# Altium PCB PCB1.PcbDoc
Units mil, origin at the board's own origin, x right, y up, seen from the top; angles counter-clockwise.
Board outline 4500 x 2600 mil, 2 copper layers (Top Layer, Bottom Layer), stack 60.4 mil thick; 12 components, 26 nets, 99 pads, 0 vias.
Unrouted connection lines stored in the file: 42.
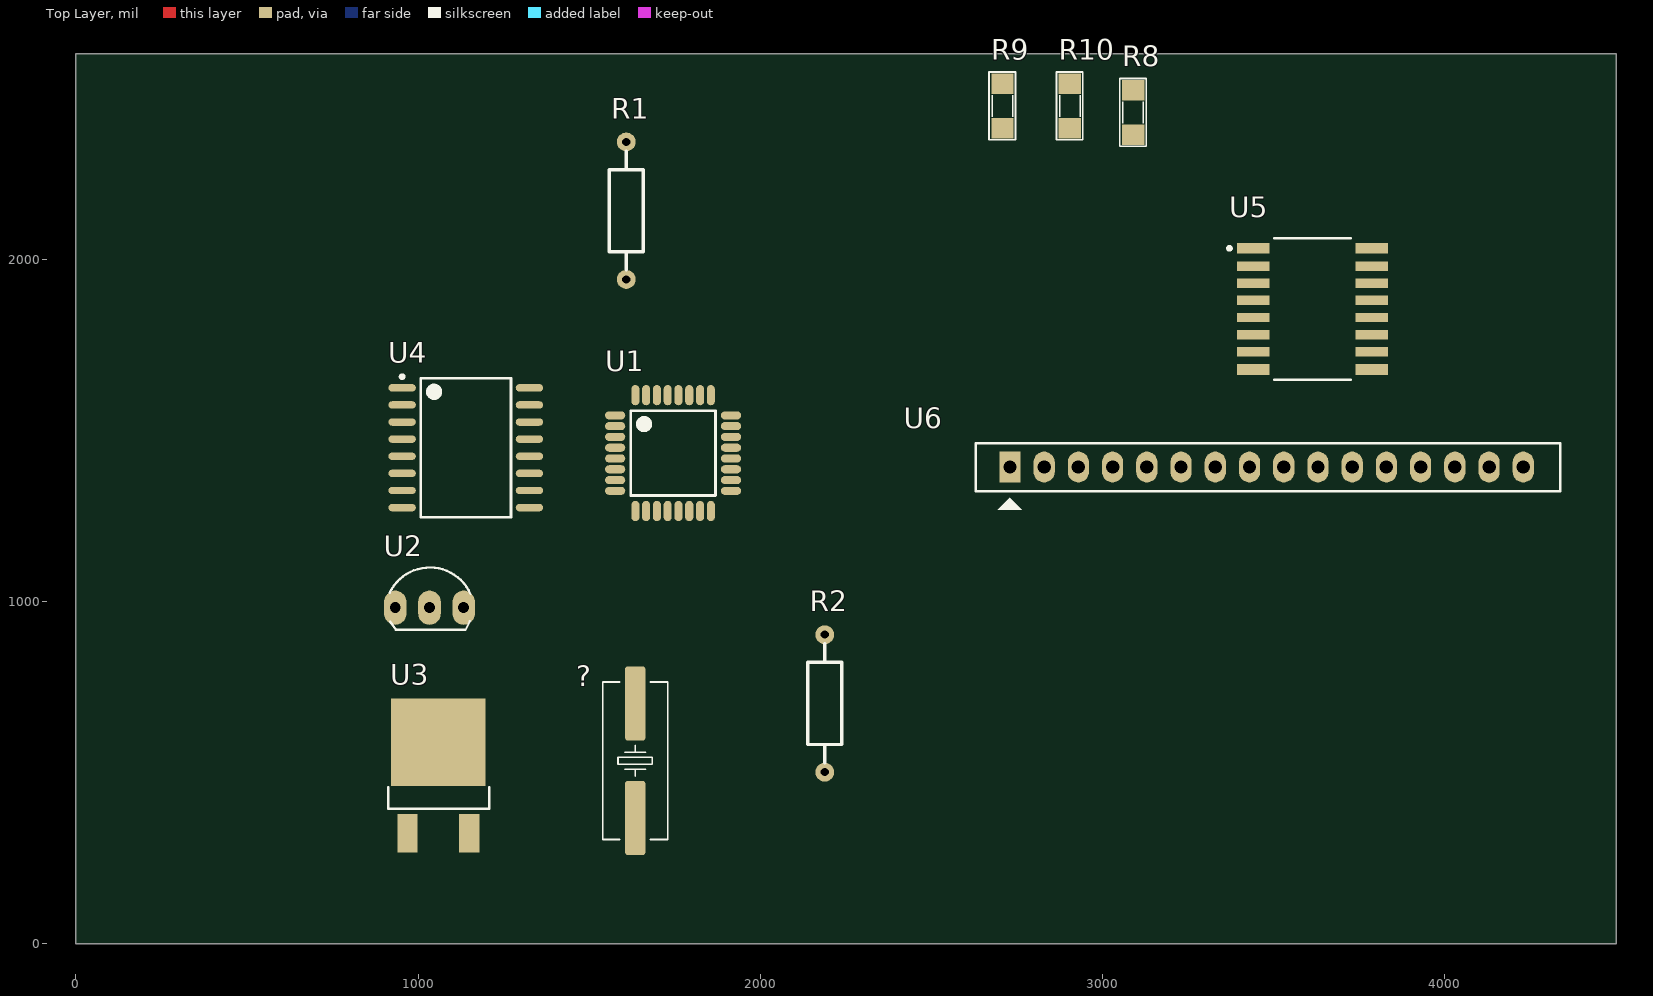
[diagram p0: Top Layer view]
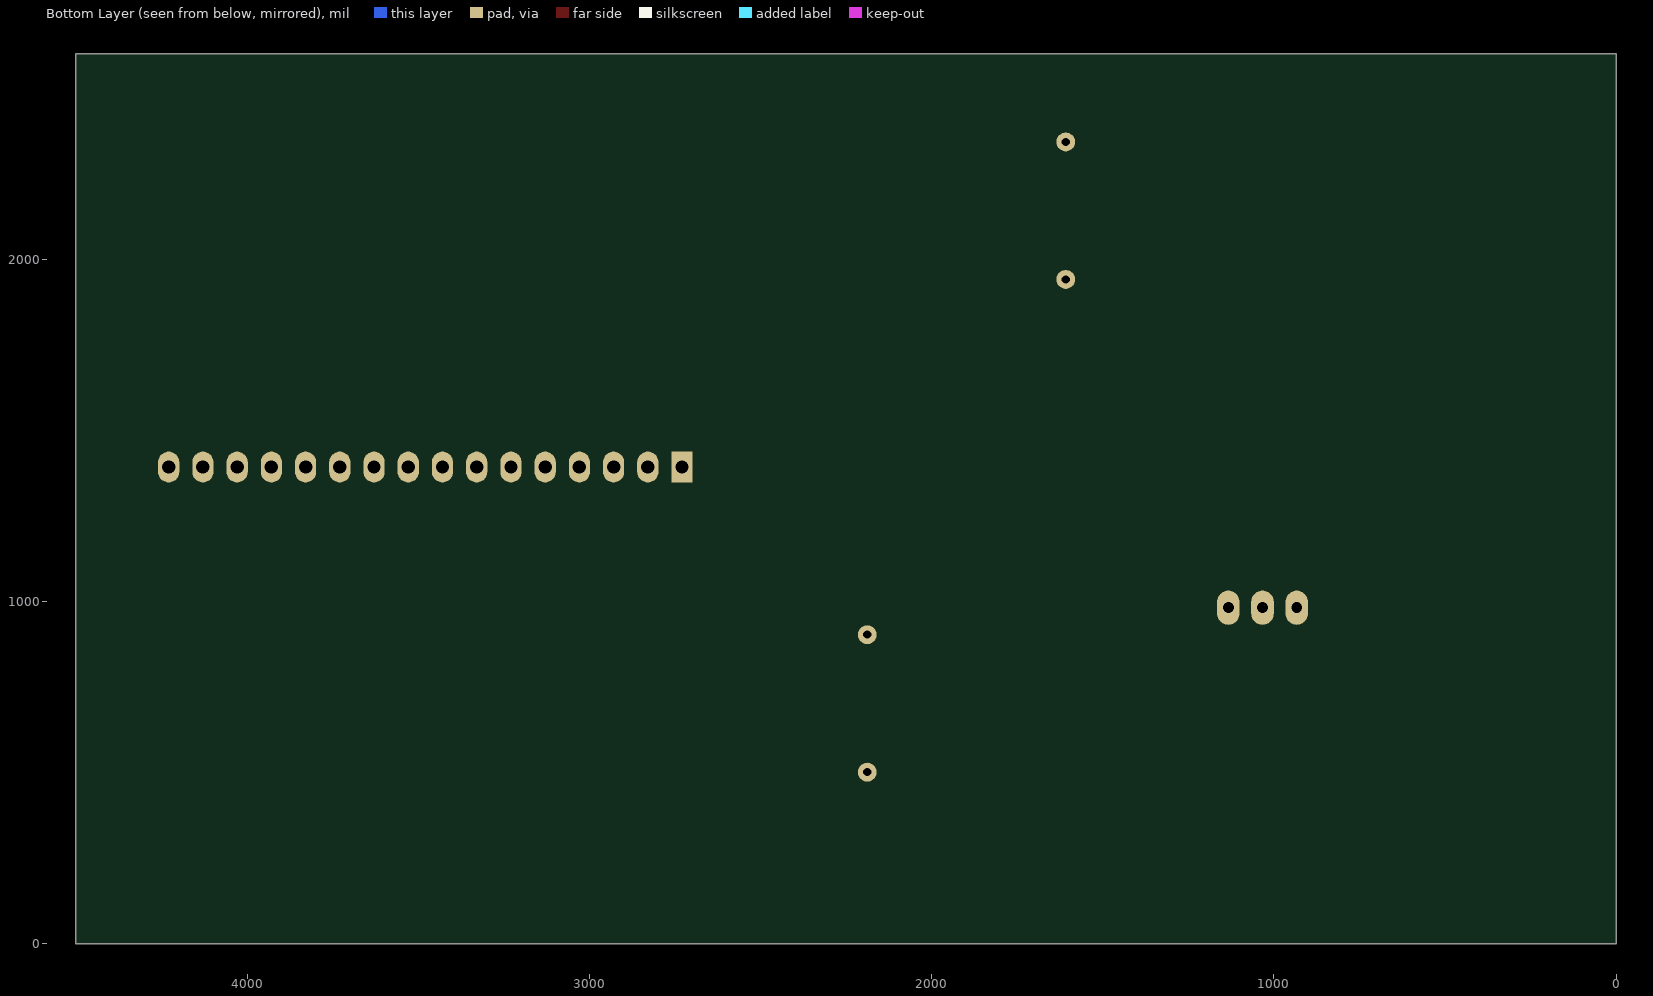
[diagram p1: Bottom Layer view, seen from below]

## Layer stack, top to bottom
Top Solder: solder mask 0.5, Solder Resist, Dk 3.3
Top Layer: signal copper 0.7
Dielectric1: core 59, FR-4, Dk 4.3
Bottom Layer: signal copper 0.7
Bottom Solder: solder mask 0.5, Solder Resist, Dk 3.3

## Board outline
0,0 4500,0 4500,2600 0,2600

## Design rules (kind name [scope] priority, off if disabled: settings)
Clearance [All] p1: gap=10 ignorepadtopadclearanceinfootprint=FALSE
DiffPairsRouting [All] p1: maxlimit=10 minlimit=10 mostfreqgap=10 toplayer_minwidth=10 toplayer_maxwidth=10 toplayer_prefwidth=10 bottomlayer_minwidth=10 bottomlayer_maxwidth=10 bottomlayer_prefwidth=10 maxuncoupledlength=500
HoleSize [All] p1: absolutevalues=TRUE maxlimit=300 minlimit=10 maxpercent=80.000 minpercent=20.000
MinimumAnnularRing [All] p1: minimumring=10
PasteMaskExpansion [All] p1: expansion=10
PlaneClearance [All] p1: clearance=15
PlaneConnect [All] p1: pad.planeconnectstyle=Relief pad.reliefexpansion=20 pad.reliefentries=4 pad.reliefconductorwidth=10 pad.reliefairgap=10 via.planeconnectstyle=Direct via.reliefexpansion=20 via.reliefentries=4 via.reliefconductorwidth=10 via.reliefairgap=10
PolygonConnect [All] p1: thpad.connectstyle=Relief thpad.reliefconductorwidth=10 thpad.reliefentries=4 thpad.polygonreliefangle="90 Angle" thpad.airgapwidth=10 smdpad.connectstyle=Relief smdpad.reliefconductorwidth=10 smdpad.reliefentries=4 smdpad.polygonreliefangle="90 Angle" smdpad.airgapwidth=10 via.connectstyle=Direct via.reliefconductorwidth=10 via.reliefentries=4 via.polygonreliefangle="90 Angle" via.airgapwidth=10
RoomDefinition Sheet1 [InComponentClass('Sheet1')] p1: confinementstyle=ConfineIn formatcopy=TRUE lockcomponents=FALSE outline -267,-186 4658,-186 4658,2994 -267,2994
RoutingVias [All] p1: holewidth=10 width=20 viastyle="Through Hole" minholewidth=10 minwidth=20 maxholewidth=10 maxwidth=20
SMDNeckDown [All] p1: percent=100.000
SilkToSolderMaskClearance SilkscreenOverComponentPads [IsPad] p1: minsilkscreentomaskgap=10 clearancetoexposedcopper=TRUE
SolderMaskExpansion [All] p1: expansion=10 istentingtop=FALSE
SupplyNets "Schematic Supply Nets_2" [InNet('GND')] p1: voltage=0.000
SupplyNets "Schematic Supply Nets_1" [InNet('+12V')] p2: voltage=0.000
SupplyNets "Schematic Supply Nets" [InNet('+5V')] p3: voltage=0.000
Width [All] p1: maxlimit=10 minlimit=10 preferedwidth=10
24 further rules are at their usual default settings.

## Components (designator, comment, footprint, x,y, rotation, side; value= is the part's Value field where it differs from the comment)
? "16Mhz" "Thach Anh 2 chan SMD" 1634,535 r90 top value=4Mhz
R1 "10k" "tro vach 1/4w" 1608,2142 r90 top
R2 "10k" "tro vach 1/4w" 2187.98,702.32 r90 top
R8 "10k" SM-RES-1206 3089,2364 r90 top value="R1/4W - 1K"
R9 "10k" SM-RES-1206 2707,2383 r90 top value="R1/4W - 1K"
R10 "10k" SM-RES-1206 2904,2383 r90 top value="R1/4W - 1K"
U1 "ATMEGA328P" TQFP-32 1744.76,1433.71 r0 top
U2 "LM35" QTO-92 1033,982 r0 top
U3 "L7805" DPAK_118_446_112X59_SMD 1054,481.64 r90 top
U4 "DS3231" "SOIC 16" 1139,1449.46 r0 top
U5 "PCF8574" FP-SOT162-1-MFG 3613,1855 r0 top
U6 "LCD1602" "LCD1602 with Jump" 2729,1393 r0 top

## Footprints (in the part's own frame and the unit in brackets; to place one, negate y for a bottom-side part, rotate by r counter-clockwise, add the part's x,y. Pads: shape width x height; smd on the part's side, far side on the other; paste and mask are expansions set on the pad)
DPAK_118_446_112X59_SMD [mm] "CASE: DPAK"
  rect 2.85x1.5 smd: 1(-4.023,2.163) 3(-4.023,-2.417)
  rect 6.5x7 smd: 2(2.727,-0.127)
  silkscreen extent -2.22,-3.9 -0.62,3.6, body extent -4.47,-3.43 5.23,3.15, height 2.3
FP-SOT162-1-MFG [mm]
  rect 2.4x0.8 smd paste+0 mask+0: 1(-4.4,4.495) 8(-4.4,-4.495) 9(4.4,-4.495) 16(4.4,4.495)
  rect 2.4x0.7 smd paste+0 mask+0: 2(-4.4,3.175) 3(-4.4,1.905) 4(-4.4,0.635) 5(-4.4,-0.635) 6(-4.4,-1.905) 7(-4.4,-3.175) 10(4.4,-3.175) 11(4.4,-1.905) 12(4.4,-0.635) 13(4.4,0.635) 14(4.4,1.905) 15(4.4,3.175)
  silkscreen extent -6.29,-5.25 2.83,5.25, body extent -5.72,-5.95 5.72,5.95, height 0.25
"LCD1602 with Jump" [mil] "LCD dipslay 16x2, 16 pin"
  rect 62x90 hole 39: 1(0,0)
  oval 62x90 hole 39: 2(100,0) 3(200,0) 4(300,0) 5(400,0) 6(500,0) 7(600,0) 8(700,0) 9(800,0) 10(900,0) 11(1000,0) 12(1100,0) 13(1200,0) 14(1300,0) 15(1400,0) 16(1500,0)
  silkscreen extent -100,-125 1608,70, body extent -320,-1353 2850,84, height 764
QTO-92 [mil] "TO-92"
  oval 66x100 hole 32: 1(-100,0) 2(0,0) 3(100,0)
  silkscreen extent -117,-65 120,118, body extent -109,-66 109,95, height 245
SM-RES-1206 [mil]
  rect 60x65 smd: 1(0,0) 2(130,0)
  silkscreen extent -34,-38 164,39, body extent 2,-31 128,32, height 40
"SOIC 16" [mm] "SOIC, 16-Leads, Body 10.30x7.50mm, Pitch 1.27mm, IPC Medium Density"
  oval 2.032x0.55 smd: 1(-4.725,4.445) 2(-4.725,3.175) 3(-4.725,1.905) 4(-4.725,0.635) 5(-4.725,-0.635) 6(-4.725,-1.905) 7(-4.725,-3.175) 8(-4.725,-4.445) 9(4.725,-4.445) 10(4.725,-3.175) 11(4.725,-1.905) 12(4.725,-0.635) 13(4.725,0.635) 14(4.725,1.905) 15(4.725,3.175) 16(4.725,4.445)
  silkscreen extent -4.85,-5.15 3.35,5.39, body extent -5.15,-5.17 5.16,5.16, height 2.48
"Thach Anh 2 chan SMD" [mm] "SMD Crystal HC49/US-SM package"
  round 0.508 on Mech15: 0(0,0)
  rrect25% 5.5x1.5 smd: 1(-4.25,0) 2(4.25,0)
  silkscreen extent -5.84,-2.41 5.84,2.41, body extent -6.4,-2.41 6.4,2.42, height 4.29
TQFP-32 [mm] "TQFP, 32-Leads, Body 7.10x7.10mm, Pitch 0.80mm, IPC Medium Density"
  oval 1.5x0.6 smd mask+0.076: 1(-4.3,2.8) 2(-4.3,2) 3(-4.3,1.2) 4(-4.3,0.4) 5(-4.3,-0.4) 6(-4.3,-1.2) 7(-4.3,-2) 8(-4.3,-2.8) 17(4.3,-2.8) 18(4.3,-2) 19(4.3,-1.2) 20(4.3,-0.4) 21(4.3,0.4) 22(4.3,1.2) 23(4.3,2) 24(4.3,2.8)
  oval 0.6x1.5 smd mask+0.076: 9(-2.8,-4.3) 10(-2,-4.3) 11(-1.2,-4.3) 12(-0.4,-4.3) 13(0.4,-4.3) 14(1.2,-4.3) 15(2,-4.3) 16(2.8,-4.3) 25(2.8,4.3) 26(2,4.3) 27(1.2,4.3) 28(0.4,4.3) 29(-0.4,4.3) 30(-1.2,4.3) 31(-2,4.3) 32(-2.8,4.3)
  silkscreen extent -3.15,-3.15 3.15,3.15, body extent -4.62,-4.62 4.63,4.63, height 1.2
"tro vach 1/4w" [mm]
  round 1.4 hole 0.6: 1(-5.1,0) 2(5.1,0)
  silkscreen extent -4.39,-1.25 4.42,1.25, body extent -5.38,-1.2 5.38,1.2, height 2.41

## Part data
?: library part "Thach Anh 2 chan SMD", "Crystal For all Crystal 2pin."
R1 R2: library part "Tro Vach 1/4W 5% 10k", "Căm", Chung_Loai=Cắm, Don_Vi=Con, Ma_Hang=MH007354, So_Chan=2, Ten_Linh_Kien="Trở Vạch 1/4w 5% 10K"
R8 R9 R10: library part R, "Resistor 1/4W"
U1: library part IC_ATMEGA328P, "AVR AVR® ATmega Microcontroller IC 8-Bit 20MHz 32KB (16K x 16) FLASH 32-TQFP (7x7)", Alternate Part Number-1=NA, Case/Package=32-TQFP, Manufacturer="Microchip Technology", Manufacturer Part Number=ATMEGA328P-AUR, Supplier Part Number-1=ATMEGA328P-AUR, Supplier-1=Arrow
U2: "Teminal"
U3: library part REG_35V_5V-1.5A-7.5W-DPAK, "Linear Voltage Regulator IC 1 Output 1.5A DPAK", Alternate Part Number-1="CJ7805 3%", Case/Package=DPAK, Manufacturer=Diodes, Manufacturer Part Number=L7805CDT-TR, Supplier Part Number-1=L7805CDT-TR, Supplier-1="SP ROAD"
U4: library part "DS3231 SMD", "SOIC"
U5: library part CMP-10112-000010-1, "IC I/O EXPANDER I2C 8B 16SOIC", Ambient Temperature Range High=+85°C, Ambient Temperature Range Low=-40°C, Frequency=100kHz, Manufacturer="NXP Semiconductors", Manufacturer Part Number=PCF8574T/3,518, Max Junction Temp=+125°C, Max Supply Voltage=6V, Min Supply Voltage=2.5V, Nominal Supply Current=40uA, Package=SOT162-1, Temperature="-40°C to +85°C", Automotive=No, Category=IC, ComponentLink2Description=Datasheet, ComponentLink2URL=https://www.nxp.com/docs/en/data-sheet/PCF8574_PCF8574A.pdf, Device Class L1="Integrated Circuits (ICs)", Device Class L2="Interface ICs", Device Class L3="I/O Expanders", Digikey Description="IC I/O EXPANDER I2C 8B 16SOIC", Footprint Url=https://www.nxp.com/docs/en/package-information/SOT162-1.pdf, Height=2.65mm, Interface=I2C, Ipc Land Pattern Name=SOIC127P1032X265-16, Lead Free=Yes, Mouser Description="PCF8574 Series 2.5 - 6V Remote 8-bit I/O Expander for I2C-bus - SOIC-16", Number Of I/Os=8, Octopart=https://octopart.com/pcf8574t%2F3%2C518-nxp+semiconductors-10470852, RoHS=TRUE, Standoff Height=0.1mm, Temperature Range High=+85°C, Temperature Range Low=-40°C
U6: library part "LCD1602 XL", "LCD 1602 Xanh Lá", CHIP=HD44780, Ma_Hang=67HZ, NCC=NSHOP, Ten="Màn hình LCD 1602 Xanh Lá"

## Nets (pads, with @x,y where several pads share a name; then routed paths per layer and width w, separated by ;. In a path a pad name is that pad's centre, name@x,y a point inside that pad or via, vN(x,y) a via of type N, cw(c..) or ccw(c..) an arc to the next point about the centre after c; other vN are vias at no path point)
+5V: R1.2 R8.1 R9.1 R10.1 U1.4 U1.6 U1.18 U2.1 U3.3 U4.2 U5.16 U6.2
+12V: U3.1
A: U6.15
AREF: U1.20
GND: U1.3 U1.5 U1.21 U2.3 U3.2 U4.13 U5.8 U6.1 U6.7 U6.8 U6.9 U6.10 U6.16
Net?_1: ?.1 U1.8
Net?_2: ?.2 U1.7
NetD1_A: 
NetD2_K: U4.14
"NetMode switch?_2": R2.1
NetR2_2: R2.2 U1.32
NetR7_1: U6.3
NetR8_2: R8.2 U5.3
NetR9_2: R9.2 U5.2
NetR10_2: R10.2 U5.1
P0: U5.4 U6.4
P1: U5.5 U6.5
P2: U5.6 U6.6
P4: U5.9 U6.11
P5: U5.10 U6.12
P6: U5.11 U6.13
P7: U5.12 U6.14
PC0: U1.23 U2.2
RST: R1.1 U1.29
SCL: U1.28 U4.16 U5.14
SDA: U1.27 U4.15 U5.15
pads on no net: ?.0 U1.1 U1.2 U1.9 U1.10 U1.11 U1.12 U1.13 U1.14 U1.15 U1.16 U1.17 U1.19 U1.22 U1.24 U1.25 U1.26 U1.30 U1.31 U4.1 U4.3 U4.4 U4.5 U4.6 U4.7 U4.8 U4.9 U4.10 U4.11 U4.12 U5.7 U5.13